# EAGLE board Sensor_Board_Try2 (EAGLE 8.1.0)
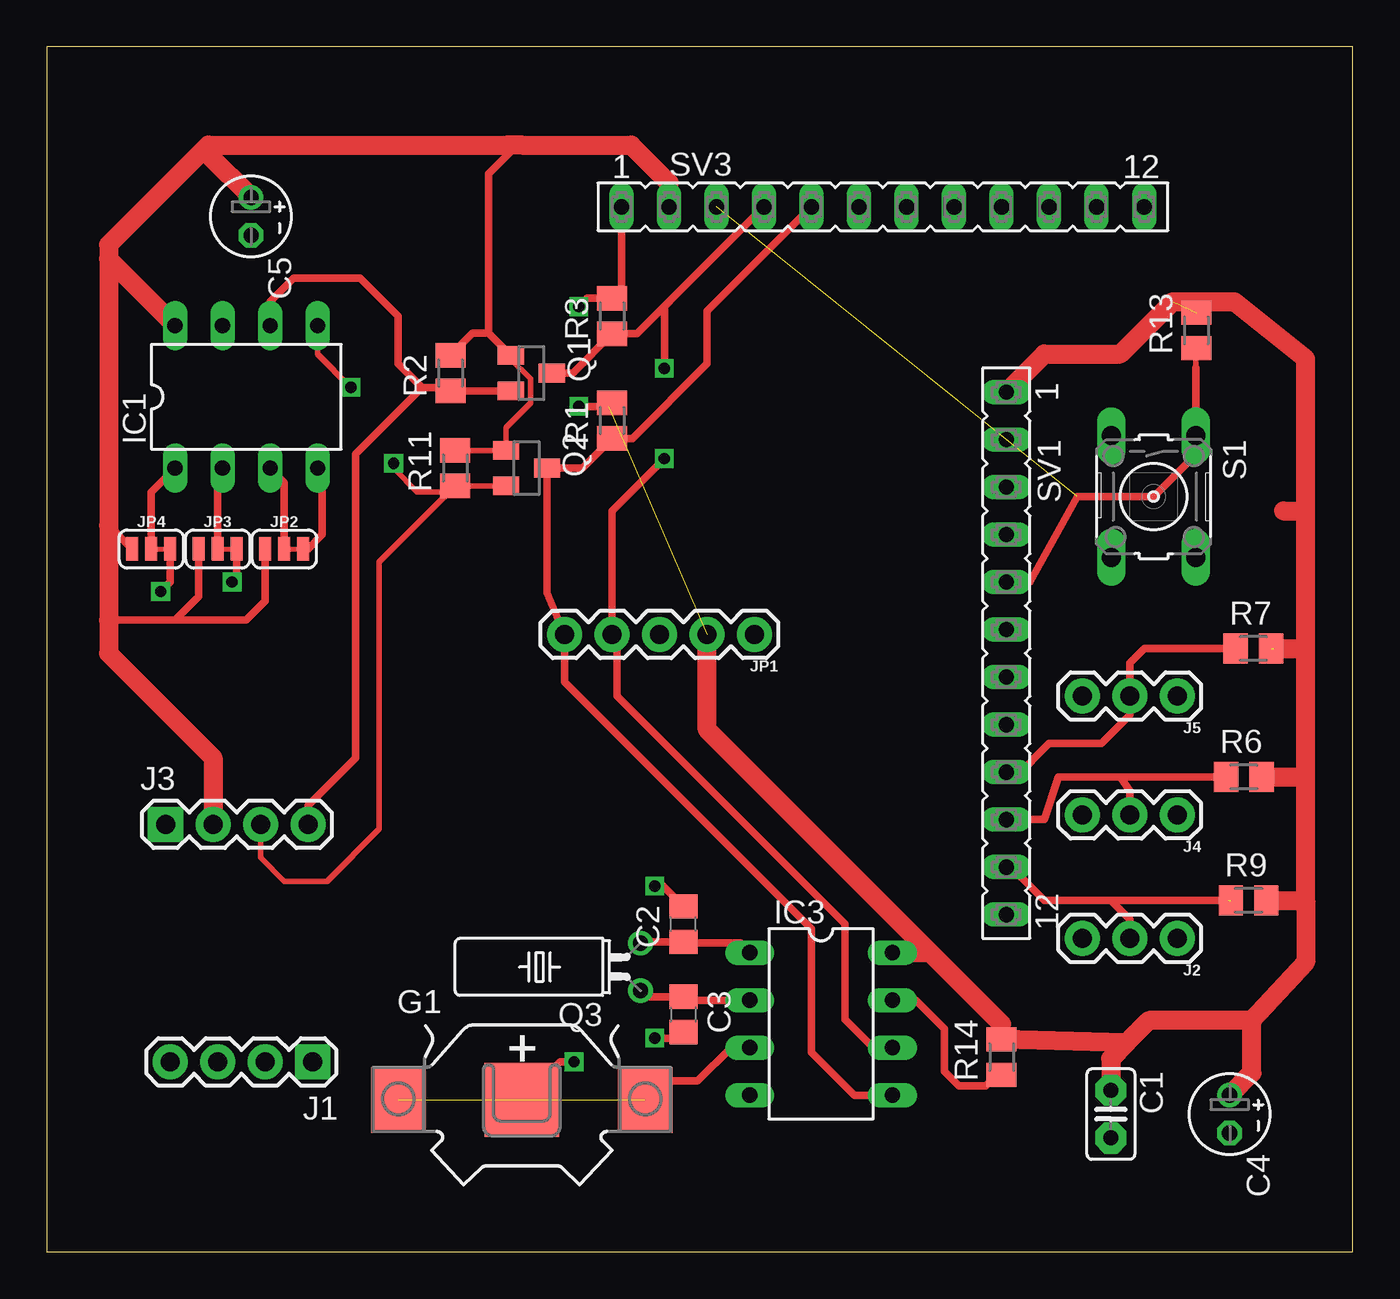
[diagram p0: board, top side]
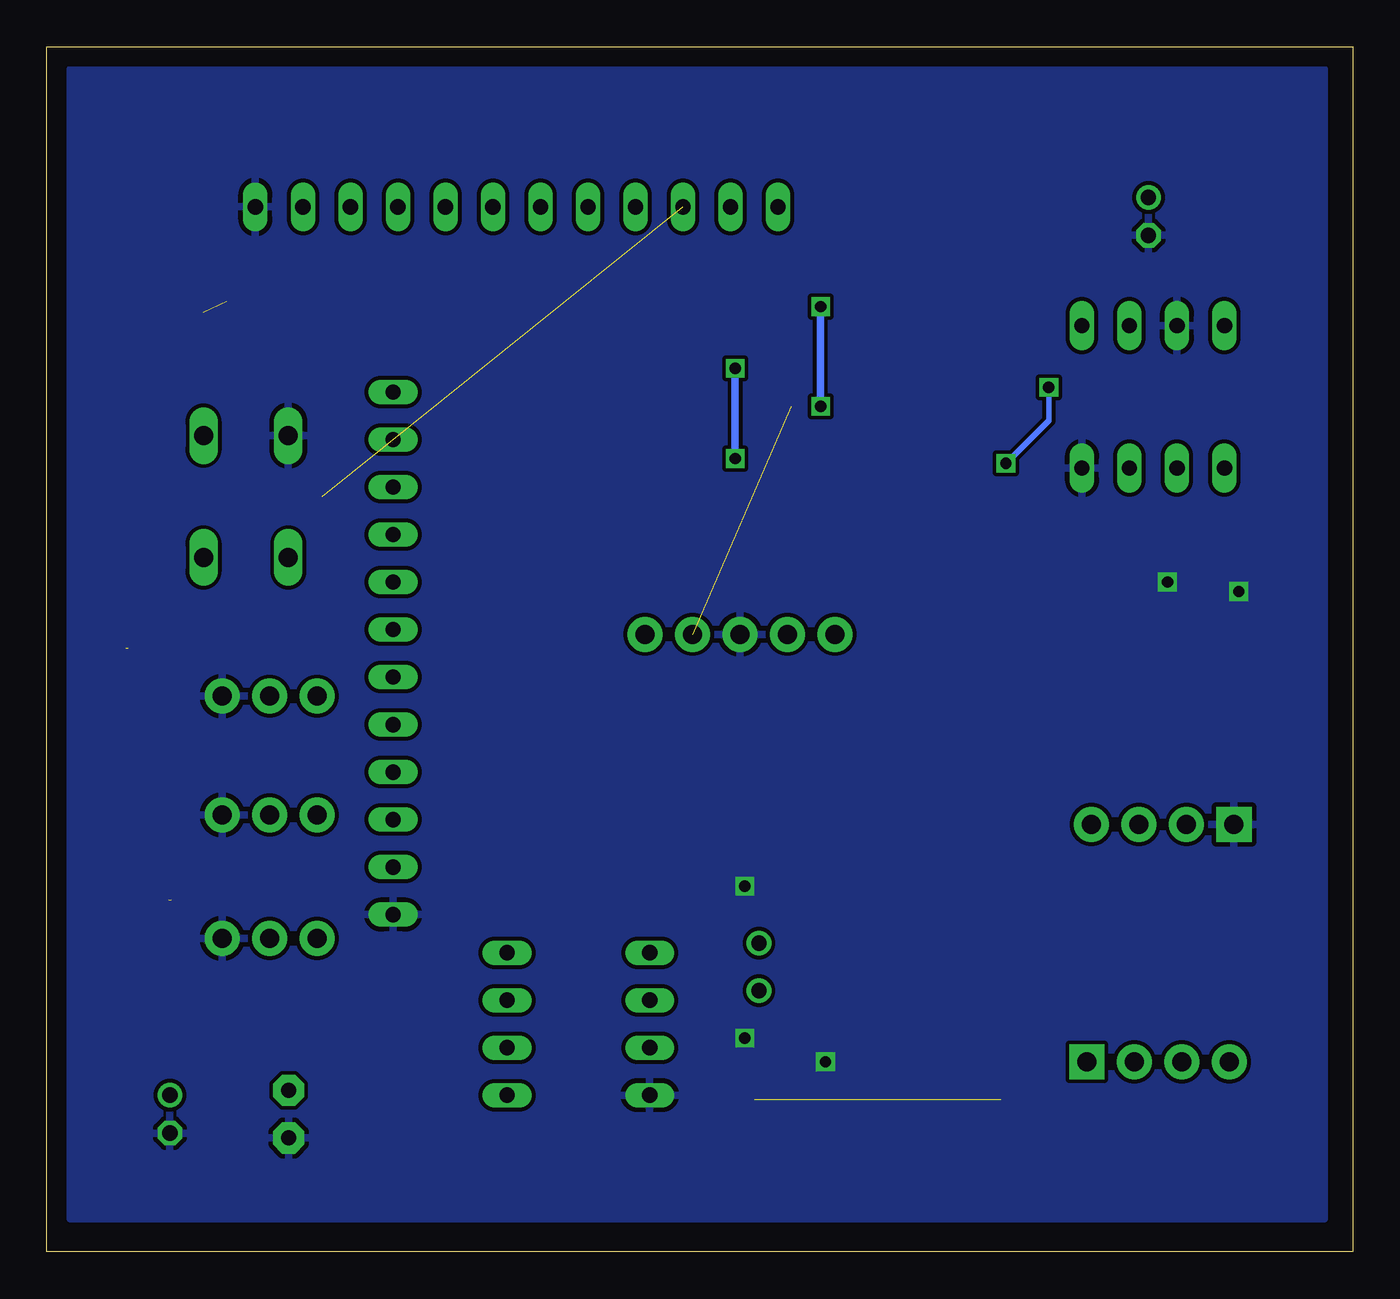
[diagram p1: board, bottom side, seen from below]

Size 69.83 x 64.44 mm. Coordinates in mm from the lower left corner, seen from the top.
Outline: 0,0 69.83,0 69.83,64.44 0,64.44 0,0
Copper layers (1*16): Top 0.035mm / dielectric 1.5mm / Bottom 0.035mm
Design rules "default": minimum track width 10mil, minimum drill 24mil, track to track 8mil, track to pad 8mil, pad to pad 8mil, via to via 8mil, smd to smd 8mil, copper to edge 40mil, drill to drill 8mil, minimum pad ring 10mil, minimum via ring 8mil, stop-mask expansion 4mil, vias tented up to drill 0mil, thermal gap 10mil

## Footprints (pad centres in the part's own frame; a part is rotated, then mirrored left to right if it is on the bottom)
C025-025X050 = drill 0.813 pad 1.676 octagon: 1 -1.27,0; 2 1.27,0
C0805 = smd 1.3 x 1.5: 1 -0.95,0; 2 0.95,0
E2-4 = drill 0.813 pad 1.27: + -1.016,0 | drill 0.813 pad 1.27 octagon: - 1.016,0
10MM_SM_COIN_CELL_CLIP = smd 2.9 x 3.5: +@1 -6.6,0; +@2 6.6,0 | smd 3.96 x 3.96: - 0,0
DIL08 = drill 0.813 long: 1 -3.81,-3.81; 2 -1.27,-3.81; 3 1.27,-3.81; 4 3.81,-3.81; 5 3.81,3.81; 6 1.27,3.81; 7 -1.27,3.81; 8 -3.81,3.81
1X04 = drill 1.016 pad 1.88 square: 1 0,0 | drill 1.016 pad 1.88: 2 2.54,0; 3 5.08,0; 4 7.62,0
1X03 = drill 1.016 pad 1.88: 1 0,0; 2 2.54,0; 3 5.08,0
1X05 = drill 1.016 pad 1.88: 1 0,0; 2 2.54,0; 3 5.08,0; 4 7.62,0; 5 10.16,0
SMT-JUMPER_3_1-NC_TRACE_SILK = smd 0.635 x 1.27: 1 -1.016,0; 2 0,0; 3 1.016,0
SOT23 = smd 1 x 1.4: 1 -0.95,-1.1; 2 0.95,-1.1; 3 0,1.1
TC38H = drill 0.813: 1 -1.27,0; 2 1.27,0
M0805 = smd 1.3 x 1.6: 1 -0.95,0; 2 0.95,0
B3F-10XX = drill 1.016 long: 1 -3.251,2.261; 2 3.251,2.261; 3 -3.251,-2.261; 4 3.251,-2.261
FE12 = drill 0.813 long: 1 -13.97,0; 2 -11.43,0; 3 -8.89,0; 4 -6.35,0; 5 -3.81,0; 6 -1.27,0; 7 1.27,0; 8 3.81,0; 9 6.35,0; 10 8.89,0; 11 11.43,0; 12 13.97,0

## Placement (x,y rotation side)
C1  0.1uF  [C025-025X050]  56.9,7.37 270 top
C2  12.5pF  [C0805]  34.04,17.53 90 top
C3  12.5pF  [C0805]  34.04,12.7 270 top
C4  [E2-4]  63.25,7.37 270 top
C5  [E2-4]  10.92,55.37 270 top
G1  10MM_SM_COIN_CELL_CLIP  [10MM_SM_COIN_CELL_CLIP]  25.4,8.13 0 top
IC1  AT24CP  [DIL08]  10.67,45.72 0 top
IC3  DS1307  [DIL08]  41.4,12.19 270 top
J1  [1X04]  14.22,10.16 180 top
J2  [1X03]  60.45,16.76 180 top
J3  [1X04]  6.35,22.86 0 top
J4  [1X03]  60.45,23.37 180 top
J5  [1X03]  60.45,29.72 180 top
JP1  [1X05]  37.85,33.02 180 top
JP2  JP2  [SMT-JUMPER_3_1-NC_TRACE_SILK]  12.7,37.59 0 top
JP3  JP3  [SMT-JUMPER_3_1-NC_TRACE_SILK]  9.14,37.59 0 top
JP4  JP4  [SMT-JUMPER_3_1-NC_TRACE_SILK]  5.59,37.59 0 top
Q1  BSS123  [SOT23]  25.91,46.99 270 top
Q2  BSS123  [SOT23]  25.65,41.91 270 top
Q3  32.768  [TC38H]  31.75,15.24 90 top
R1  10k  [M0805]  30.23,44.45 90 top
R2  10k  [M0805]  21.59,46.99 90 top
R3  10k  [M0805]  30.23,50.04 90 top
R6  4.7k  [M0805]  64.01,25.4 0 top
R7  4.7k  [M0805]  64.52,32.26 0 top
R9  4.7k  [M0805]  64.26,18.8 0 top
R11  10k  [M0805]  21.84,41.91 90 top
R13  10k  [M0805]  61.47,49.28 90 top
R14  4.7k  [M0805]  51.05,10.41 90 top
S1  [B3F-10XX]  59.18,40.39 270 top
SV1  [FE12]  51.31,32 270 top
SV3  [FE12]  44.7,55.88 0 top

## Library data of the parts
C1 IC3 = adafruit
C2 C3 = eagle-ltspice; SPICEMODEL: NONE; SPICEPREFIX: C
C4 C5 R1-R3 R6 R7 R9 R11 R13 R14 = rcl
G1 = battery
IC1 = atmel; MPN: AT24C1024BW-SH-B; OC_FARNELL: 1362646; OC_NEWARK: 03P2044
J1 J3 = SparkFun-Connectors; PROD_ID: CONN-09696
J2 J4 J5 JP1 = SparkFun-Connectors
JP2-JP4 = SparkFun-Jumpers
Q1 Q2 = transistor-small-signal
Q3 = crystal
S1 = switch-omron; MPN: B3F-1000; OC_FARNELL: 176432; OC_NEWARK: 36M3542
SV1 SV3 = con-lsta; OC_FARNELL: unknown; OC_NEWARK: unknown

## Nets
3V: C5.+ IC1.8 J3.2 JP2.1 JP3.1 JP4.1 Q1.1 Q2.1 R2.2 R11.2 SV3.2
5V: C1.1 C4.+ IC3.8 JP1.2 R1.2 R3.2 R6.2 R7.2 R9.2 R13.2 R14.2 SV1.1 SV3.1
A0: IC1.1 JP4.2
A1: IC1.2 JP3.2
A2: IC1.3 JP2.2
ADC0: SV3.9
ADC1: SV3.8
ADC2: SV3.7
ADC3: SV3.6
ADC6: SV3.11
ADC7: SV3.10
GND: C1.2 C2.2 C3.2 C4.- C5.- G1.- IC1.4 IC1.7 IC3.4 J2.1 J3.1 J4.1 J5.1 JP1.3 JP2.3 JP3.3 JP4.3 S1.3 SV1.12 SV3.12
MOSI: SV1.4
MOSO: SV1.3
N$1: J1.1
N$2: J1.2
N$3: J1.3
N$4: J1.4
N$5: JP1.1
N$14: C2.1 IC3.1 Q3.2
N$15: C3.1 IC3.2 Q3.1
OC1A: SV1.7
OC1B: SV1.6
PB0: SV1.8
PD5: J2.2 R9.1 SV1.11
PD6: J4.2 R6.1 SV1.10
PD7: J5.2 R7.1 SV1.9
RESET: R13.1 S1.1 SV1.5 SV3.3
SCK: SV1.2
SCL: IC3.6 JP1.4 Q1.3 R3.1 SV3.4
SCLL: IC1.6 J3.4 Q1.2 R2.1
SDA: IC3.5 JP1.5 Q2.3 R1.1 SV3.5
SDAL: IC1.5 J3.3 Q2.2 R11.1
SQW: IC3.7 R14.1
VBAT: G1.+@1 G1.+@2 IC3.3

## Tracks (layer width: path | path; a pad name or v marks a point on that pad's centre or on a via)
3V
  Top 0.305: Q1.1 24.81,47.74 25.86,46.69 25.86,45.39 24.55,44.08 Q2.1 R11.2
  Top 0.406: 3.3,38.86 JP4.1 | 3.3,33.78 6.86,33.78 | 6.86,33.78 8.13,35.05 JP3.1 | 6.86,33.78 10.67,33.78 11.68,34.8 JP2.1 | 23.62,49.13 Q1.1 | 23.62,49.13 23.62,57.66 24.64,58.67 | 24.64,58.67 24.64,59.18 | 24.64,58.67 25.15,59.18 25.4,59.18 | R2.2 22.78,49.13 23.62,49.13
  Top 1.016: SV3.2 33.27,57.15 31.24,59.18 25.4,59.18 24.64,59.18 8.64,59.18 | 8.64,59.18 3.3,53.85 3.3,53.09 | 3.3,53.09 3.3,38.86 3.3,33.78 3.3,32 8.89,26.42 J3.2 | 3.3,53.09 IC1.8 | C5.+ 8.64,58.67 8.64,59.18
5V  (via drill 0.6)  (3 unrouted)
  Top 0.406: R1.2 30.04,45.21 v28.45,45.21 | v28.45,50.55 28.89,50.99 R3.2 30.73,51.5 SV3.1
  Top 1.016: SV1.1 53.34,48.01 57.4,48.01 60.2,50.8 63.5,50.8 67.31,47.75 67.31,39.62 | 67.31,32.26 67.31,39.62 | 67.31,25.4 67.31,32.26 | 67.31,18.8 67.31,25.4 | 67.31,18.8 67.31,15.49 64.44,12.37 | 66.12,39.62 67.31,39.62 | 65.61,32.26 67.31,32.26 | 64.44,12.37 58.93,12.37 57.74,11.18 | 47.24,16 IC3.8 | 47.24,16 35.31,27.94 JP1.2 | C4.+ 64.44,9.57 64.44,12.37 | R6.2 67.31,25.4 | R9.2 67.31,18.8 | 57.74,11.18 56.9,10.34 C1.1 | 57.74,11.18 R14.2 51.05,12.19 47.24,16
  Bottom 0.406: v28.45,45.21 v28.45,50.55
A0
  Top 0.406: JP4.2 5.59,40.64 IC1.1
A1
  Top 0.406: JP3.2 9.14,41.66 IC1.2
A2
  Top 0.406: JP2.2 12.7,41.15 IC1.3
GND  (via drill 0.6)
  Top 0.406: JP2.3 13.97,37.59 14.73,38.35 14.73,41.66 IC1.4 | JP3.3 10.16,36.07 v9.91,35.81 | JP4.3 6.6,35.81 v6.1,35.31 | C3.2 33.72,11.43 v32.51,11.43 | C2.2 32.95,19.56 v32.51,19.56 | G1.- 27.43,10.16 v28.19,10.16
  Bottom 0.406: v28.19,10.16 28.19,9.91
  pour Bottom: 1.52,63.25 68.58,63.25 68.58,1.78 1.52,1.78
N$14
  Top 0.406: IC3.1 37.08,16.51 34.1,16.51 C2.1 31.82,16.58 Q3.2
N$15
  Top 0.406: IC3.2 34.22,13.46 C3.1 32.07,13.65 Q3.1
PD5  (1 unrouted)
  Top 0.406: SV1.11 51.82,20.32 53.34,18.8 56.9,18.8 | 56.9,18.8 57.91,17.78 J2.2 | 56.9,18.8 63.17,18.8
PD6
  Top 0.305: 62.74,25.4 R6.1
  Top 0.406: SV1.10 53.34,23.11 54.1,25.4 57.4,25.4 | 57.4,25.4 57.91,24.64 J4.2 | 57.4,25.4 62.74,25.4
PD7
  Top 0.406: SV1.9 51.82,25.4 53.59,27.18 56.39,27.18 57.91,28.7 J5.2 57.91,31.5 58.67,32.26 R7.1
RESET  (1 unrouted)
  Top 0.305: R13.1 61.44,48.3 61.44,47.3
  Top 0.406: SV1.5 52.58,35.81 55.12,40.39 59.18,40.39 61.47,42.67 61.47,43.61 S1.1 61.44,47.3
SCL  (via drill 0.6)
  Top 0.406: IC3.6 44.2,10.92 42.67,12.45 42.67,17.53 30.48,29.72 30.48,32.77 JP1.4 30.23,39.62 v33.02,42.42 | SV3.4 33.66,51.18 | 33.66,51.18 31.56,49.09 R3.1 28.13,46.99 Q1.3 | 33.66,51.18 33.02,50.55 v33.02,47.24
  Bottom 0.406: v33.02,47.24 v33.02,42.42
SCLL
  Top 0.406: Q1.2 R2.1 21.4,46.23 20.07,46.23 | 20.07,46.23 18.8,47.5 18.8,50.04 16.76,52.07 13.21,52.07 11.94,50.8 IC1.6 | 20.07,46.23 16.51,42.67 16.51,26.42 13.97,23.88 J3.4 | J3.4 13.97,22.1 J3.4
SDA
  Top 0.406: IC3.5 43.18,8.38 40.89,10.67 40.89,17.27 27.69,30.48 JP1.5 26.75,35.22 Q2.3 28.64,41.91 R1.1 31.31,43.5 35.31,47.5 35.31,50.29 SV3.5
SDAL  (via drill 0.6)
  Top 0.305: Q2.2 R11.1 | R11.1 17.78,36.9 17.78,22.61 14.99,19.81 12.7,19.81 11.43,21.08 J3.3 | R11.1 21.52,40.64 19.81,40.64 18.54,41.91 v18.54,42.16 | v16.26,46.23 14.48,48.01 IC1.5
  Bottom 0.305: v18.54,42.16 16.26,44.45 v16.26,46.23
SQW
  Top 0.406: IC3.7 46.48,13.46 48.01,11.94 48.01,9.65 48.77,8.89 50.21,8.89 50.79,9.46 R14.1
VBAT  (1 unrouted)
  Top 0.406: G1.+@2 33.02,9.14 34.8,9.14 36.58,10.92 IC3.3